# Altium PCB Buffer.PcbDoc
Units mil, origin at the board's own origin, x right, y up, seen from the top; angles counter-clockwise.
Board outline 6000 x 4000 mil, 2 copper layers (Top Layer, Bottom Layer); 12 components, 8 nets, 38 pads, 0 vias.
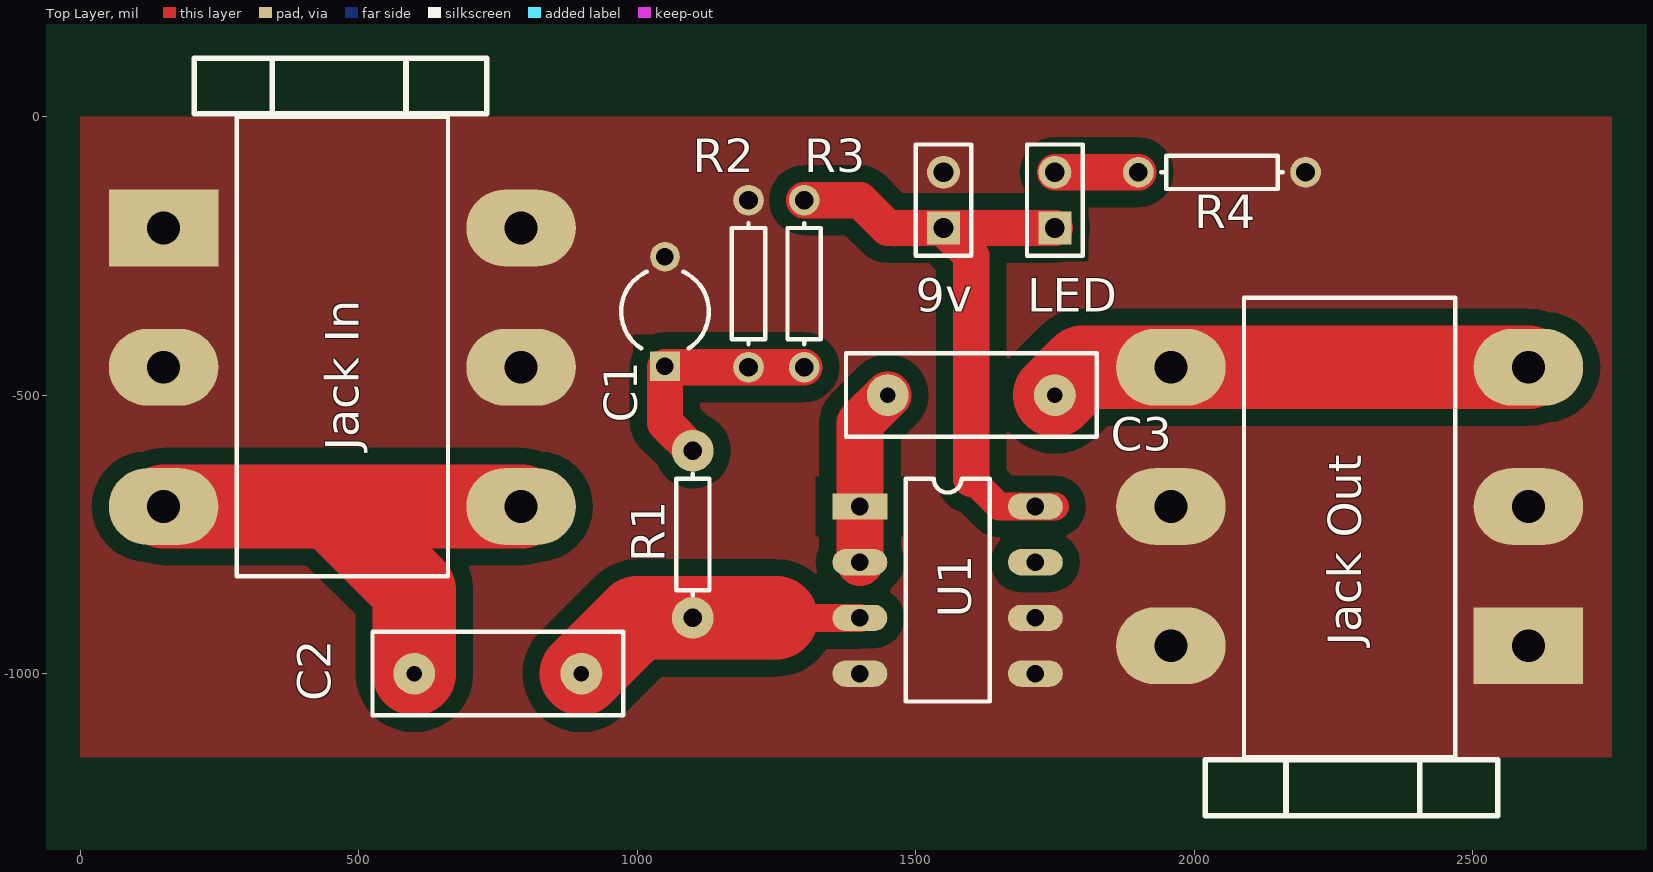
[diagram p0: Top Layer view]
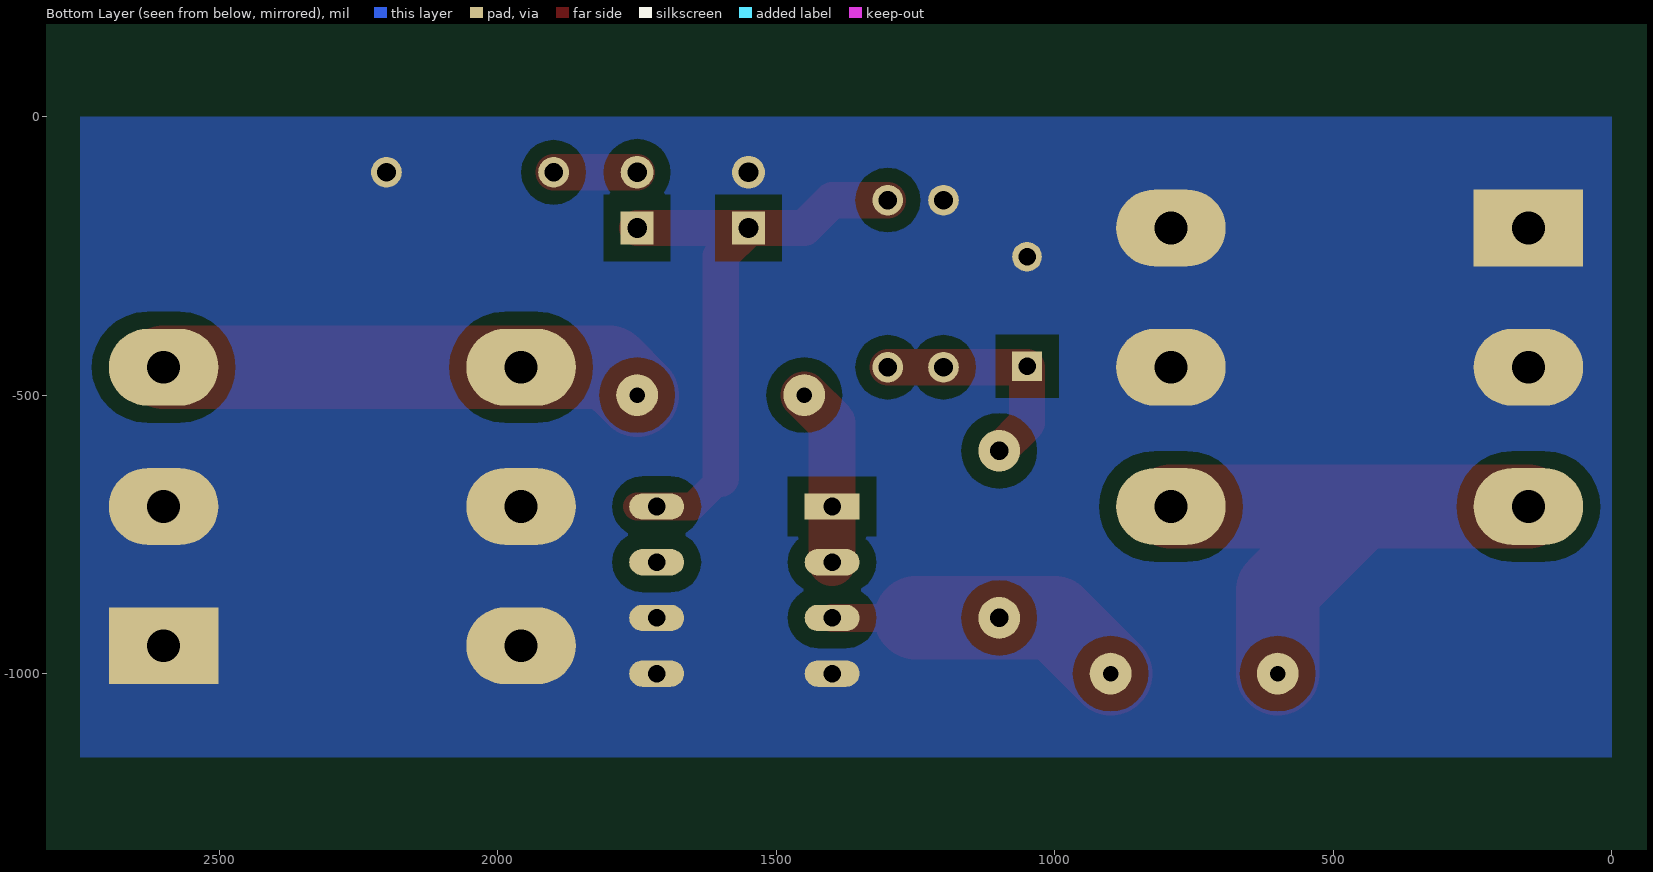
[diagram p1: Bottom Layer view, seen from below]

## Layer stack, top to bottom
Top Layer: signal copper 1.4
Dielectric: dielectric 12.6, FR-4, Dk 4.8
Bottom Layer: signal copper 1.4

## Board outline
-1160,-1860 4840,-1860 4840,2140 -1160,2140

## Design rules (kind name [scope] priority, off if disabled: settings)
Clearance [All] p1: gap=30
PlaneConnect [All] p1: planeconnectstyle=Direct reliefexpansion=20 reliefentries=4 reliefconductorwidth=10 reliefairgap=10
PolygonConnect [All] p1: connectstyle=Direct reliefconductorwidth=10 reliefentries=4 polygonreliefangle="90 Angle" airgapwidth=10
RoutingLayers [All] p1: top layer_v5=TRUE bottom layer_v5=FALSE
RoutingVias [All] p1: holewidth=28 width=50 viastyle="Through Hole" minholewidth=28 minwidth=50 maxholewidth=28 maxwidth=50
SolderMaskExpansion [All] p1: expansion=4
Width [All] p1: maxlimit=150 minlimit=20 preferedwidth=30
26 further rules are at their usual default settings.

## Components (designator, comment, footprint, x,y, rotation, side; value= is the part's Value field where it differs from the comment)
9v "Header 2" HDR1X2 1550,-200 r90 top
C1 "Cap2" CAPR5-4X5 1050,-350 r90 top
C2 "Cap" RAD-0.3 750,-1000 r0 top
C3 "Cap" RAD-0.3 1600,-500 r180 top
"Jack In" "Jack P10 Stereo Board" J10 150,-200 r0 top
"Jack Out" "Jack P10 Stereo Board" J10 2600,-950 r180 top
LED "Header 2" HDR1X2 1750,-200 r90 top
R1 "Res1" AXIAL-0.3#1 1100,-750 r90 top
R2 "Res1" AXIAL-0.3#2 1200,-300 r270 top
R3 "Res1" AXIAL-0.3#2 1300,-300 r90 top
R4 "Res1" AXIAL-0.3#2 2050,-100 r0 top
U1 "RC4558" RC4558DIP8 1400,-700 r0 top

## Footprints (in the part's own frame and the unit in brackets; to place one, negate y for a bottom-side part, rotate by r counter-clockwise, add the part's x,y. Pads: shape width x height; smd on the part's side, far side on the other; paste and mask are expansions set on the pad)
AXIAL-0.3#1 [mm] "Axial Device, Thru-Hole; 2 Leads; 0.3 in Pin Spacing"
  round 1.905 hole 0.85: 1(-3.81,0) 2(3.81,0)
  silkscreen extent -2.77,-0.76 2.77,0.76
AXIAL-0.3#2 [mm] "Axial Device, Thru-Hole; 2 Leads; 0.3 in Pin Spacing"
  round 1.4 hole 0.85: 1(-3.81,0) 2(3.81,0)
  silkscreen extent -2.77,-0.76 2.77,0.76
CAPR5-4X5 [mm] "Capacitor; 2 Leads"
  rect 1.35x1.35 hole 0.8: 1(-2.5,0)
  round 1.35 hole 0.8: 2(2.5,0)
  silkscreen extent -1.69,-2 1.82,2
HDR1X2 [mm] "Connector; Header; 2 Position"
  rect 1.5x1.5 hole 0.9: 1(0,0)
  round 1.5 hole 0.9: 2(2.54,0)
  silkscreen extent -1.27,-1.27 3.81,1.27
J10 [mm]
  rect 5x3.5 hole 1.5: 1(0,0)
  oval 5x3.5 hole 1.5: 2(0,-6.35) 3(0,-12.7) 4(16.3,-12.7) 5(16.3,-6.35) 6(16.3,0)
  silkscreen extent 1.4,-15.88 14.73,7.75
RAD-0.3 [mm] "Radial Cap, Thru-Hole; 2 Leads; 0.3 in Pin Spacing"
  round 1.905 hole 0.7: 1(-3.81,0) 2(3.81,0)
  silkscreen extent -5.71,-1.91 5.71,1.91
RC4558DIP8 [mm]
  rect 2.5x1.2 hole 0.8: 1(0,0)
  oval 2.5x1.2 hole 0.8: 2(0,-2.54) 3(0,-5.08) 4(0,-7.62) 5(8,-7.62) 6(8,-5.08) 7(8,-2.54) 8(8,0)
  silkscreen extent 2.08,-8.89 5.91,1.27

## Part data
9v LED: "Header, 2-Pin"
C1 C2 C3: "Capacitor"
R1 R2 R3 R4: "Resistor"

## Nets (pads, with @x,y where several pads share a name; then routed paths per layer and width w, separated by ;. In a path a pad name is that pad's centre, name@x,y a point inside that pad or via, vN(x,y) a via of type N, cw(c..) or ccw(c..) an arc to the next point about the centre after c; other vN are vias at no path point)
4.5V: C1.1 R1.2 R2.2 R3.1 | length 420.7
  Top Layer w65: R1.2 1050,-550 1050,-450 R2.2 R3.1
9V: 9v.1 LED.1 R3.2 U1.8 | length 1112.1
  Top Layer w50: 1600,-650 1650,-700 U1.8 U1.8@1750,-700
  Top Layer w65: R3.2 1400,-150 1450,-200 9v.1 ; 1600,-650 1600,-250 9v.1 ; LED.1 9v.1
GND: 9v.2 "Jack In.1" "Jack In.2" "Jack In.5" "Jack In.6" "Jack Out.1" "Jack Out.2" "Jack Out.5" "Jack Out.6" C1.2 R2.1 R4.2 U1.4 U1.5 U1.6
NetC2_1: "Jack In.3" "Jack In.4" C2.1 | length 1003.9
  Top Layer w150: 150,-700 450,-700 ; C2.1 600,-850 450,-700 ; 791.73,-700 450,-700
NetC2_2: C2.2 R1.1 U1.3 | length 491.4
  Top Layer w50: 1300,-900 U1.3
  Top Layer w150: C2.2 1000,-900 R1.1 1250,-900
NetC3_1: "Jack Out.3" "Jack Out.4" C3.1 | length 870.7
  Top Layer w150: C3.1 1800,-450 1958.27,-450 2600,-450
NetC3_2: C3.2 U1.1 U1.2 | length 320.7
  Top Layer w85: U1.2 U1.1 1400,-550 C3.2
NetLED_2: LED.2 R4.1 | length 150
  Top Layer w65: LED.2 R4.1
pads on no net: U1.7

## Polygon pours and split planes (outlines as drawn)
GND on Top Layer "GND" (solid, remove dead copper, pour order 8): 0,0 2750,0 2750,-1150 0,-1150
GND on Bottom Layer "GND" (solid, remove dead copper, pour order 3): 0,0 0,-1150 2750,-1150 2750,0 0,0

## Silkscreen, mask and mechanical layers (free items; w line width, h text height)
Mechanical 1:
  lines w10: 0,-1150 2750,-1150 2750,0 0,0 0,-1150